# Altium PCB PCB.PcbDoc
Units mm, origin at the board's own origin, x right, y up, seen from the top; angles counter-clockwise.
Board outline 60.96 x 29.21 mm, 2 copper layers (Top Layer, Bottom Layer); 21 components, 16 nets, 85 pads, 15 vias.
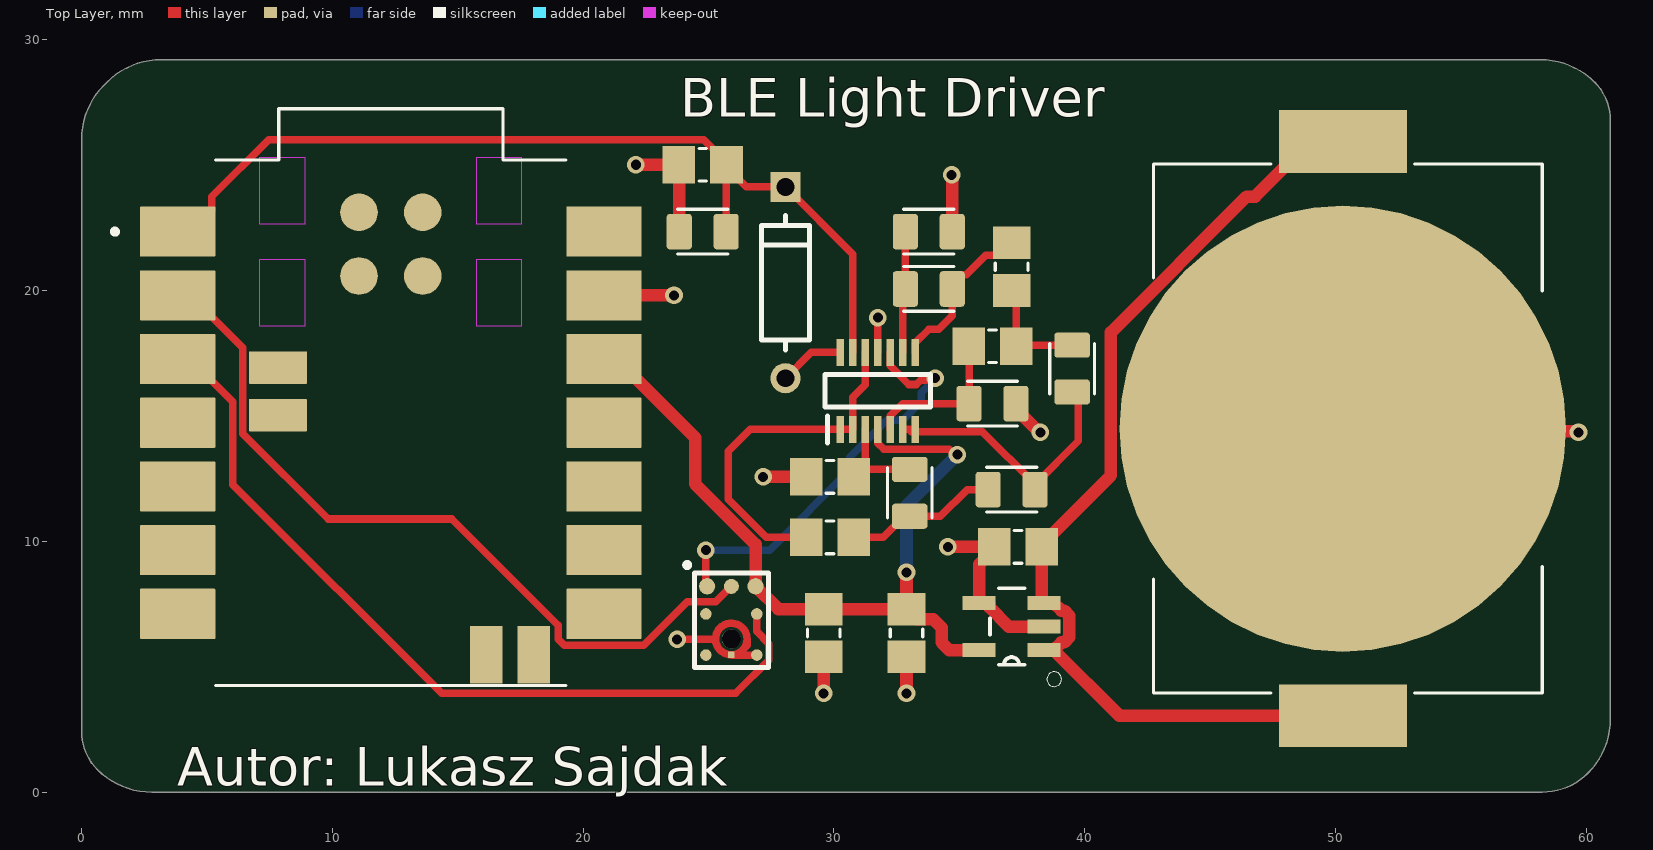
[diagram p0: Top Layer view]
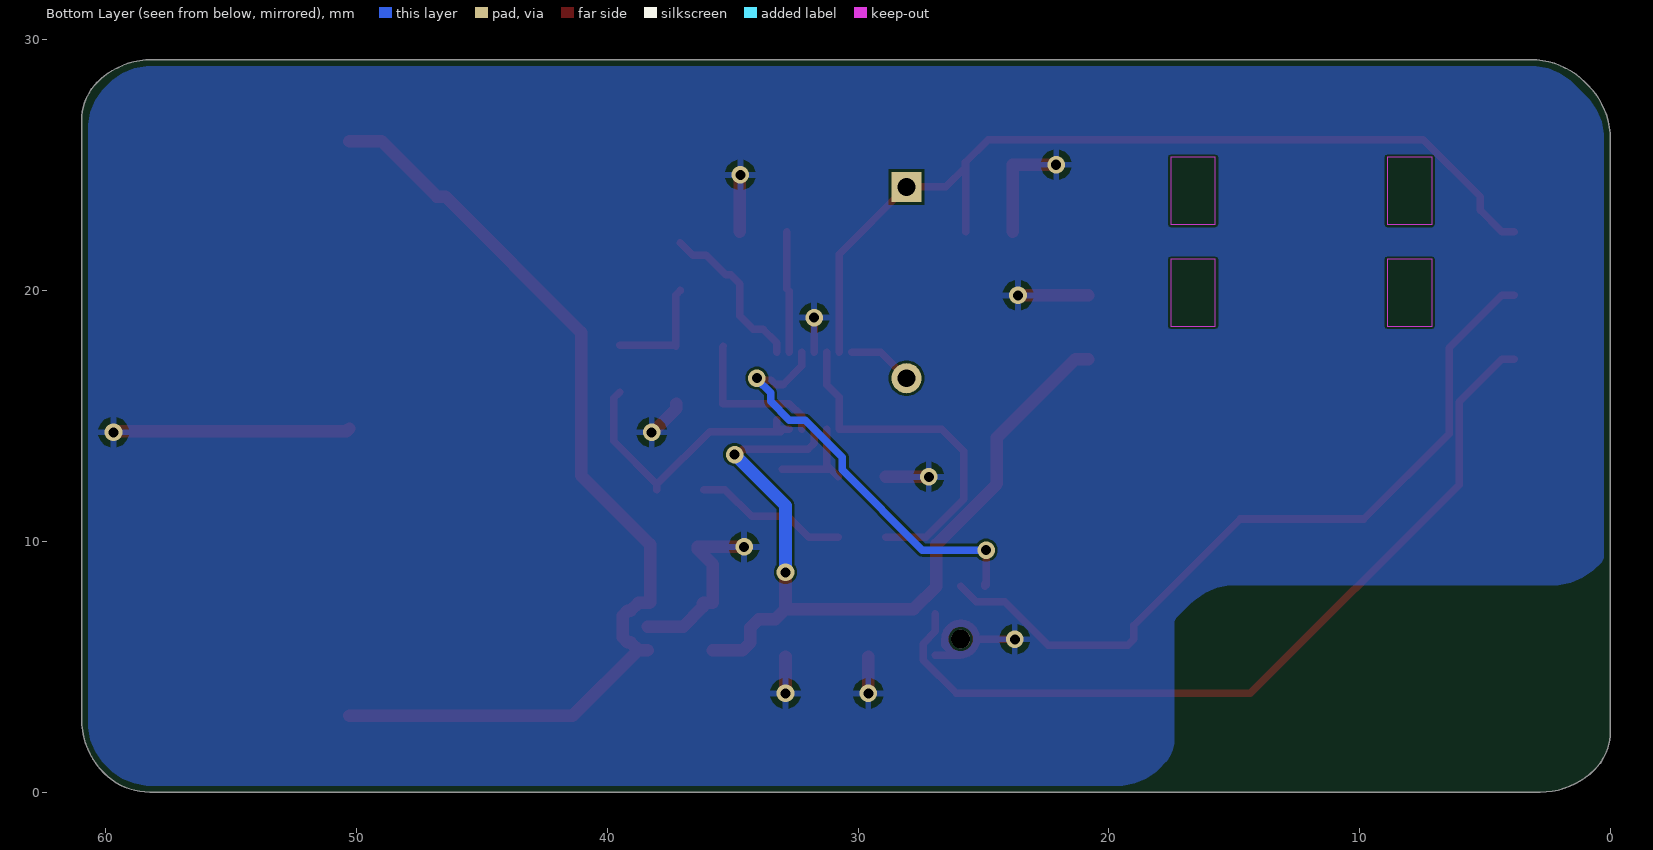
[diagram p1: Bottom Layer view, seen from below]

## Layer stack, top to bottom
Top Solder: solder mask 0.0102, Solder Resist, Dk 3.5
Top Layer: signal copper 0.0356
Dielectric 1: dielectric 0.32, FR-4, Dk 4.8
Bottom Layer: signal copper 0.0356
Bottom Solder: solder mask 0.0102, Solder Resist, Dk 3.5

## Board outline
0.626,0.898 cw(c2.137,2.409) 0,2.409 0,26.035 cw(c3.066,26.035) 0.898,28.203 1.007,28.312 cw(c3.175,26.144) 3.175,29.21 58.166,29.21 cw(c58.166,26.144) 60.334,28.312 cw(c58.823,26.801) 60.96,26.801 60.96,2.921 cw(c57.894,2.921) 60.062,0.753 cw(c58.244,2.571) 58.244,0 2.794,0 cw(c2.794,3.066)

## Design rules (kind name [scope] priority, off if disabled: settings)
Clearance [All] p1: gap=0.102 ignorepadtopadclearanceinfootprint=TRUE
MinimumSolderMaskSliver [All] p1: minsoldermaskwidth=0.089
PolygonConnect [All] p1: connectstyle=Relief reliefconductorwidth=0.254 reliefentries=4 polygonreliefangle="90 Angle" airgapwidth=0.254
RoutingVias [All] p1: holewidth=0.711 width=1.27 viastyle="Through Hole" minholewidth=0.711 minwidth=1.27 maxholewidth=0.711 maxwidth=1.27
SilkToSolderMaskClearance [IsPad] p1: minsilkscreentomaskgap=0.013 clearancetoexposedcopper=TRUE
SolderMaskExpansion [All] p1: expansion=0.102 istentingtop=FALSE
SupplyNets "Schematic Supply Nets" [InNet('GND')] p1: voltage=0.000
Width [All] p1: maxlimit=0.5 minlimit=0.254 preferedwidth=0.3
28 further rules are at their usual default settings.

## Components (designator, comment, footprint, x,y, rotation, side; value= is the part's Value field where it differs from the comment)
3.7V "LIR2032" BAT_BAT-HLD-001 50.292,14.498 r90 top
C1 "2.2u" CAPC2012X135N 37.338,9.779 r180 top
C2 "2.2u" CAPC2012X135N 32.893,6.35 r270 top
C3 "100n" CAPC2012X135N 29.591,6.35 r270 top
C4 "22n" CAPC2012X135N 37.084,20.955 r270 top
C5 "22n" CAPC2012X135N 36.322,17.78 r0 top
C6 "100n" CAPC2012X135N 29.845,10.16 r180 top
C7 "47n" CAPC2012X135N 29.845,12.573 r0 top
C8 "1u" CAPC2012X135N 24.765,25.019 r180 top
D1 "D" FP-017AG-MFG 28.067,20.32 r270 top
LDO "TPS78333" SOT95P280X110-5N 37.084,6.604 r180 top
MCU "Xiao Speed nRF52840" MODULE_102010448 12.328,14.732 r0 top
MEMS "VM1010" VM1010 25.908,6.858 r90 top
OP-AMPS "TLV9044IDYYR" SOP50P326X110-14N 31.75,16.002 r90 top
R1 "100k" RESC2012X65N 36.322,15.494 r180 top
R2 "51k" RESC2012X65N 39.497,16.891 r270 top
R3 "2.4k" RESC2012X65N 37.084,12.065 r0 top
R4 "2.4k" RESC2012X65N 33.02,11.938 r270 top
R5 "30k" RESC2012X65N 24.765,22.352 r180 top
R6 "1k" RESC2012X65N 33.782,22.352 r0 top
R7 "10k" RESC2012X65N 33.782,20.066 r0 top

## Footprints (in the part's own frame and the unit in brackets; to place one, negate y for a bottom-side part, rotate by r counter-clockwise, add the part's x,y. Pads: shape width x height; smd on the part's side, far side on the other; paste and mask are expansions set on the pad)
BAT_BAT-HLD-001 [mm]
  round 17.8 smd paste-10: N1(0,0)
  rect 2.5x5.1 smd: P1(-11.45,0) P2(11.45,0)
  silkscreen extent -10.55,-7.95 10.55,7.55, body extent -11.43,-7.75 11.43,7.75, height 4.32
CAPC2012X135N [mm]
  rect 1.3x1.5 smd: 1(-0.95,0) 2(0.95,0)
  silkscreen extent -0.15,-0.65 0.15,0.65
FP-017AG-MFG [mm]
  rect 1.2x1.2 hole 0.7 paste-2539.97 mask+0: 1(-3.813,0)
  round 1.2 hole 0.7 paste-2539.97 mask+0: 2(3.813,0)
  silkscreen extent -2.68,-0.95 2.68,0.95, body extent -4.51,-1.05 4.51,1.05, height 0.25
MODULE_102010448 [mm]
  rrect3% 3x2 smd: 0(-8.5,7.62) 1(-8.5,5.08) 2(-8.5,2.54) 3(-8.5,0) 3V3(8.5,2.54) 4(-8.5,-2.54) 5(-8.5,-5.08) 6(-8.5,-7.62) 7(8.5,-7.62) 8(8.5,-5.08) 9(8.5,-2.54) 10(8.5,0) GND(8.5,5.08) VUSB(8.5,7.62)
  rrect4% 2.3x1.3 smd: BAT_N(-4.5,2.2) BAT_P(-4.5,0.3)
  rrect4% 1.3x2.3 smd: NFC1(3.8,-9.25) NFC2(5.7,-9.25)
  round 1.5 smd: TP1(1.27,5.85) TP2(-1.27,5.85) TP3(1.27,8.39) TP5(-1.27,8.39)
  Keep-Out Layer region: -3.439,7.915 -5.217,7.915 -5.217,10.582 -3.439,10.582
  Keep-Out Layer region: -3.439,3.851 -5.217,3.851 -5.217,6.518 -3.439,6.518
  Keep-Out Layer region: 5.197,3.851 3.419,3.851 3.419,6.518 5.197,6.518
  Keep-Out Layer region: 5.197,7.915 3.419,7.915 3.419,10.582 5.197,10.582
  silkscreen extent -11.1,-10.48 6.98,12.52, body extent -8.89,-10.48 8.89,12, height 4.46
RESC2012X65N [mm]
  rrect25% 1x1.42 smd: 1(-0.935,0) 2(0.935,0)
  silkscreen extent -1,-0.89 1,0.89
SOP50P326X110-14N [mm]
  rect 1.075x0.3 smd: 1(-1.538,1.5) 2(-1.538,1) 3(-1.538,0.5) 4(-1.538,0) 5(-1.538,-0.5) 6(-1.538,-1) 7(-1.538,-1.5) 8(1.538,-1.5) 9(1.538,-1) 10(1.538,-0.5) 11(1.538,0) 12(1.538,0.5) 13(1.538,1) 14(1.538,1.5)
  silkscreen extent -2.07,-2.1 0.65,2.1, body extent -1.63,-2.1 1.63,2.1, height 1.02
SOT95P280X110-5N [mil]
  rect 52x22 smd: 1(-51,37) 2(-51,0) 3(-51,-37) 4(51,-37) 5(51,37)
  silkscreen extent -78,-60 34,94, body extent -57,-55 57,55, height 43
VM1010 [mm]
  round 0.65 smd paste-0.025 mask+0.05: 1(1.35,0.965) 6(1.35,-0.965)
  round 0.46 smd paste-0.025 mask+0.05: 2(0.25,1.015) 3(-1.39,1.015) 4(-1.39,-1.015) 5(0.25,-1.015)
  round 0.6 smd paste-0.025 mask+0.05: 7(1.35,0)
  rect 0.25x0.25 smd paste-1 mask+0: 8(-1.38,0)
  round 0.75 hole 0.75 unplated mask+0.455: ""(-0.75,0)
  Top Layer lines w0.3: -1.38,0 ccw(c-0.75,0) -1.239,-0.397 ccw(c-0.75,0) -1.147,-0.489 ccw(c-0.75,0) -1.135,-0.498 ccw(c-0.75,0) -0.75,-0.63 ccw(c-0.75,0) -1.38,0
  silkscreen extent -1.88,-1.48 2.3,1.86

## Part data
3.7V: library part BAT-HLD-001, "Holder for CR2032 and CR2025 Batteries, Surface-Mount, Bulk Packaging", Package=None, Check_prices=https://www.snapeda.com/parts/BAT-HLD-001/TE+Connectivity/view-part/?ref=eda, MF="Linx Technologies", MP=BAT-HLD-001, SnapEDA_Link=https://www.snapeda.com/parts/BAT-HLD-001/TE+Connectivity/view-part/?ref=snap
C1 C2 C3 C4 C5 C6 C7 C8: library part GRT21BC8YA225KE13L, "CAP CER 2.2UF 35V X6S 0805", Package=None, Availability=Unavailable, MP=GRT21BC8YA225KE13L, Price=None
D1: library part CMP-07163-000046-1, "DIODE GEN PURP 100V 200MA DO35", Average Rectified Current=200mA, Capacitance=4pF, Case/Package=DO-35, Current=4A, Forward Current=300mA, Forward Voltage=1V, Max Forward Surge Current (Ifsm)=1A, Max Operating Temperature=175°C, Max Power Dissipation=500mW, Max Repetitive Reverse Voltage (Vrrm)=100V, Max Reverse Current=5uA, Min Operating Temperature=-65°C, Package Quantity=2000, Contact Plating=Tin, Current Rating=200mA, Diameter=1.91mm, Element Configuration=Single, Height=4.56mm, Lead Free="Lead Free", Length=4.56mm, Max Reverse Voltage (DC)=100V, Max Surge Current=4A, Mount="Through Hole", Number of Pins=2, Output Current=200mA, Outside Diameter=1.85mm, Packaging=Bulk, Peak Non-Repetitive Surge Current=4A, Polarity=Standard, Power Dissipation=500mW, Radiation Hardening=No, REACH SVHC="No SVHC", Recovery Time=4ns, Reverse Recovery Time=4ns, Reverse Voltage=100V, Series=-, Voltage=100V, Voltage Rating (DC)=100V, Weight=0.01lb, Width=1.91mm
LDO: library part TPS78326DDCT, "150-mA, nano-IQ, low-dropout voltage regulator with enable from -40Â°C to +105Â°C", Package="SOT-23-THN-5 Texas Instruments", Check_prices=https://www.snapeda.com/parts/TPS78326DDCT/Texas+Instruments/view-part/?ref=eda, MF="Texas Instruments", MP=TPS78326DDCT, SnapEDA_Link=https://www.snapeda.com/parts/TPS78326DDCT/Texas+Instruments/view-part/?ref=snap
MCU: library part 102010448, "- nRF52840 Transceiver; Bluetooth® 5.x Evaluation Board", Package=None, Check_prices=https://www.snapeda.com/parts/102010448/Seeed+Technology+Co.%252C+Ltd/view-part/?ref=eda, MF="Seeed Technology Co., Ltd", MP=102010448, SnapEDA_Link=https://www.snapeda.com/parts/102010448/Seeed+Technology+Co.%252C+Ltd/view-part/?ref=snap
MEMS: "100 Hz ~ 10 kHz Analog Microphone Piezo MEMS Omnidirectional (-38dB Â±3dB @ 94dB SPL) Solder Pads", Package=Vesper, Availability="In Stock", Check_prices=https://www.snapeda.com/parts/VM1010/P/view-part/?ref=eda, MF=Vesper, MP=VM1010, Price=None, Purchase-URL=https://pricing.snapeda.com/search/part/VM1010/?ref=eda, SnapEDA_Link=https://www.snapeda.com/parts/VM1010/P/view-part/?ref=snap
OP-AMPS: "Integrated Circuit", Manufacturer_Name="Texas Instruments", Mouser Part Number=595-TLV9044IDYYR, Datasheet Link=https://www.ti.com/lit/ds/symlink/tlv9041.pdf?HQS=dis-mous-null-mousermode-dsf-pf-null-wwe&ts=1678359319354&ref_url=https%253A%252F%252Fwww.mouser.com%252F, Height=1.1mm, Manufacturer_Part_Number=TLV9044IDYYR, Mouser Price/Stock=https://www.mouser.co.uk/ProductDetail/Texas-Instruments/TLV9044IDYYR?qs=Li%252BoUPsLEnuuNDuU7gcpzQ%3D%3D
R1 R2 R3 R4 R5 R6 R7: library part RP73PF2A100KBTDF, "RP 2A 0.25W 100K 0.1% 25PPM 1K RL", Package=None, Availability=Unavailable, MP=RP73PF2A100KBTDF, Price=None

## Via types
v1: diameter 0.7, hole 0.4, Top Layer to Bottom Layer, 15 vias

## Nets (pads, with @x,y where several pads share a name; then routed paths per layer and width w, separated by ;. In a path a pad name is that pad's centre, name@x,y a point inside that pad or via, vN(x,y) a via of type N, cw(c..) or ccw(c..) an arc to the next point about the centre after c; other vN are vias at no path point)
GND: 3.7V.N1 C1.2 C2.2 C3.2 C7.1 C8.2 LDO.2 LDO.4 MCU.GND MEMS.4 MEMS.8 OP-AMPS.11 R1.1 R5.2 R6.2 | length 37.5
  Top Layer w0.3: v1(23.749,6.096) 25.273,6.096 ; 26.406,5.723 26.406,5.72 ; 26.538,6.108 26.538,5.852 26.406,5.72 ; MEMS.4 25.918,5.468 MEMS.8 26.164,5.478 26.305,5.619 26.397,5.711 26.406,5.72 ; OP-AMPS.11 v1(31.75,18.923)
  Top Layer w0.5: MCU.GND v1(23.622,19.812) ; v1(22.098,25.019) C8.2 23.822,25.011 23.822,22.36 R5.2 ; v1(27.178,12.573) C7.1 ; v1(29.591,3.937) C3.2 ; v1(32.893,3.937) C2.2 ; v1(34.544,9.779) C1.2 36.388,9.679 35.789,9.08 LDO.4 36.17,7.544 36.199,7.514 36.199,7.374 36.969,6.604 LDO.2 ; v1@34.671,24.638 34.717,24.592 R6.2 ; R1.1 37.257,15.284 38.19,14.351 v1(38.227,14.351) ; 3.7V.N1 50.401,14.389 59.652,14.389 v1(59.69,14.351)
  other v1: 34.694,24.615
mems: MEMS.1 OP-AMPS.10 | length 16.6
  Top Layer w0.3: v1@24.892,9.398 24.892,8.259 MEMS.1 MEMS.1@24.943,8.303 ; OP-AMPS.10 32.25,16.997 32.991,16.256 33.291,16.256 33.468,16.433 33.959,16.433 v1(34.036,16.51)
  Bottom Layer w0.3: v1(24.892,9.652) 27.432,9.652 30.632,12.852 30.632,13.36 32.105,14.833 32.74,14.833 33.49,15.583 33.49,15.925 34.036,16.471 v1(34.036,16.51)
Net3.7V_P1: 3.7V.P1 3.7V.P2 C1.1 LDO.1 LDO.3 | length 40.2
  Top Layer w0.5: C1.1 38.288,7.573 38.317,7.544 LDO.3 38.76,7.544 39.069,7.235 39.185,7.235 39.391,7.029 39.391,6.179 39.185,5.973 39.069,5.973 LDO.1@38.76,5.664 ; C1.1@38.288,9.879 41.04,12.631 41.04,18.33 46.46,23.75 46.794,23.75 48.992,25.948 3.7V.P2 ; LDO.1 LDO.1@38.76,5.664 ; 3.7V.P1 41.377,3.048 LDO.1@38.76,5.664
NetC4_1: C4.1 OP-AMPS.8 R7.2 | length 6.6
  Top Layer w0.3: OP-AMPS.8 33.25,17.928 33.79,18.467 34.177,18.467 34.717,19.007 R7.2 34.717,20.276 35.067,20.626 35.277,20.626 36.056,21.405 36.584,21.405 C4.1
NetC4_2: C4.2 C5.2 R2.1 | length 4.5
  Top Layer w0.3: C4.2 37.272,19.817 C5.2 37.318,17.826 R2.1
NetC5_1: C5.1 OP-AMPS.5 R1.2 | length 6.2
  Top Layer w0.3: OP-AMPS.5 32.25,15.007 32.737,15.494 R1.2 35.387,17.765 C5.1
NetC6_1: C6.1 R3.1 R4.2 | length 6.1
  Top Layer w0.3: C6.1 31.967,10.16 32.81,11.003 R4.2 34.244,11.003 35.306,12.065 R3.1
NetC6_2: C6.2 OP-AMPS.1 OP-AMPS.2 OP-AMPS.12 | length 14.3
  Top Layer w0.3: C6.2 27.305,10.16 25.781,11.684 25.781,13.589 26.656,14.464 OP-AMPS.1 OP-AMPS.2 30.75,15.752 31.25,16.252 OP-AMPS.12
NetC7_2: C7.2 OP-AMPS.3 R4.1 | length 4
  Top Layer w0.3: C7.2 31.25,13.028 OP-AMPS.3 ; C7.2@31.095,12.873 R4.1
NetC8_1: C8.1 D1.1 MCU.0 OP-AMPS.13 R5.1 | length 37.2
  Top Layer w0.3: MCU.0 4.328,22.352 5.178,23.202 5.178,23.737 7.462,26.021 24.813,26.021 25.715,25.119 C8.1 25.7,25.004 R5.1 ; C8.1@25.715,24.919 26.501,24.133 D1.1 30.75,21.45 OP-AMPS.13
NetD1_2: D1.2 OP-AMPS.14 | length 2.6
  Top Layer w0.3: D1.2 29.1,17.54 OP-AMPS.14
NetMCU_1: MCU.1 MEMS.7 | length 31.2
  Top Layer w0.3: MCU.1 4.328,19.812 6.426,17.714 6.426,14.293 9.826,10.893 14.757,10.893 19.004,6.646 19.004,6.098 19.241,5.86 22.415,5.86 24.144,7.59 25.29,7.59 MEMS.7
NetMCU_2: MCU.2 MEMS.5 | length 33.6
  Top Layer w0.3: MCU.2 4.328,17.272 6.025,15.575 6.025,12.263 14.351,3.937 26.073,3.937 27.405,5.269 27.405,5.926 26.923,6.407 MEMS.5
NetOP-AMPS_6: OP-AMPS.6 OP-AMPS.7 R2.2 R3.2 | length 11.5
  Top Layer w0.3: OP-AMPS.6 33,14.464 ; OP-AMPS.7@33.25,14.851 OP-AMPS.7 33,14.464 ; R3.2 R3.2@38.019,12.275 ; R2.2 39.751,15.702 39.751,14.007 R3.2@38.019,12.275 ; 33,14.464 33.092,14.372 35.922,14.372 R3.2@38.019,12.275
NetOP-AMPS_9: OP-AMPS.9 R6.1 R7.1 | length 4.9
  Top Layer w0.3: OP-AMPS.9 32.75,19.969 R7.1 R6.1
power: C2.1 C3.1 LDO.5 MCU.3V3 MEMS.6 OP-AMPS.4 | length 33.1
  Top Layer w0.3: OP-AMPS.4 31.75,13.921 31.996,13.675 34.604,13.675 34.817,13.462 v1(34.925,13.462)
  Top Layer w0.5: MCU.3V3 21.328,17.272 24.461,14.139 24.461,12.294 26.873,9.883 MEMS.6 27.781,7.3 C3.1 C2.1 ; v1(32.893,8.763) C2.1 ; LDO.5 34.595,5.664 34.29,5.969 34.29,6.565 33.955,6.9 33.293,6.9 C2.1
  Bottom Layer w0.5: v1(32.893,8.763) 32.893,11.43 v1(34.925,13.462)
pads on no net: MCU.3 MCU.4 MCU.5 MCU.6 MCU.7 MCU.8 MCU.9 MCU.10 MCU.BAT_N MCU.BAT_P MCU.NFC1 MCU.NFC2 MCU.TP1 MCU.TP2 MCU.TP3 MCU.TP5 MCU.VUSB MEMS. MEMS.2 MEMS.3

## Polygon pours and split planes (outlines as drawn)
GND on Bottom Layer "GND_L02_P001" (solid, pour order 1): 0.254,25.999 cw(c2.794,25.999) 0.998,27.795 1.415,28.212 cw(c3.211,26.416) 3.211,28.956 58.13,28.956 cw(c58.13,26.416) 59.926,28.212 59.962,28.176 cw(c58.166,26.38) 60.706,26.38 60.706,2.83 cw(c58.166,2.83) 59.962,1.034 59.926,0.998 cw(c58.13,2.794) 58.13,0.254 19.685,0.254 cw(c19.685,2.707) 17.951,0.972 17.78,1.143 cw(c18.7,2.063) 17.399,2.063 17.399,6.678 ccw(c16.965,6.678) 17.272,6.985 16.746,7.511 ccw(c14.95,5.715) 14.95,8.255 2.322,8.255 cw(c2.322,10.795) 0.526,8.999 0.381,9.144 cw(c0.688,9.451) 0.254,9.451 0.254,16.002

## Silkscreen, mask and mechanical layers (free items; w line width, h text height)
Top Overlay:
  text "BLE Light Driver" at 23.876,26.924 h1.52
  text "Autor: Lukasz Sajdak" at 3.81,0.254 h1.52
Mechanical 1:
  lines w0.254: 0,2.409 ccw(c2.137,2.409) 0.626,0.898 ccw(c2.794,3.066) 2.794,0 58.244,0 ccw(c58.244,2.571) 60.062,0.753 ccw(c57.894,2.921) 60.96,2.921 60.96,26.801 ccw(c58.823,26.801) 60.334,28.312 ccw(c58.166,26.144) 58.166,29.21 8.89,29.21 3.175,29.21 ccw(c3.175,26.144) 1.007,28.312 0.898,28.203 ccw(c3.066,26.035) 0,26.035 0,2.409